# EAGLE board Eddy Backplane (EAGLE 9.5.2)
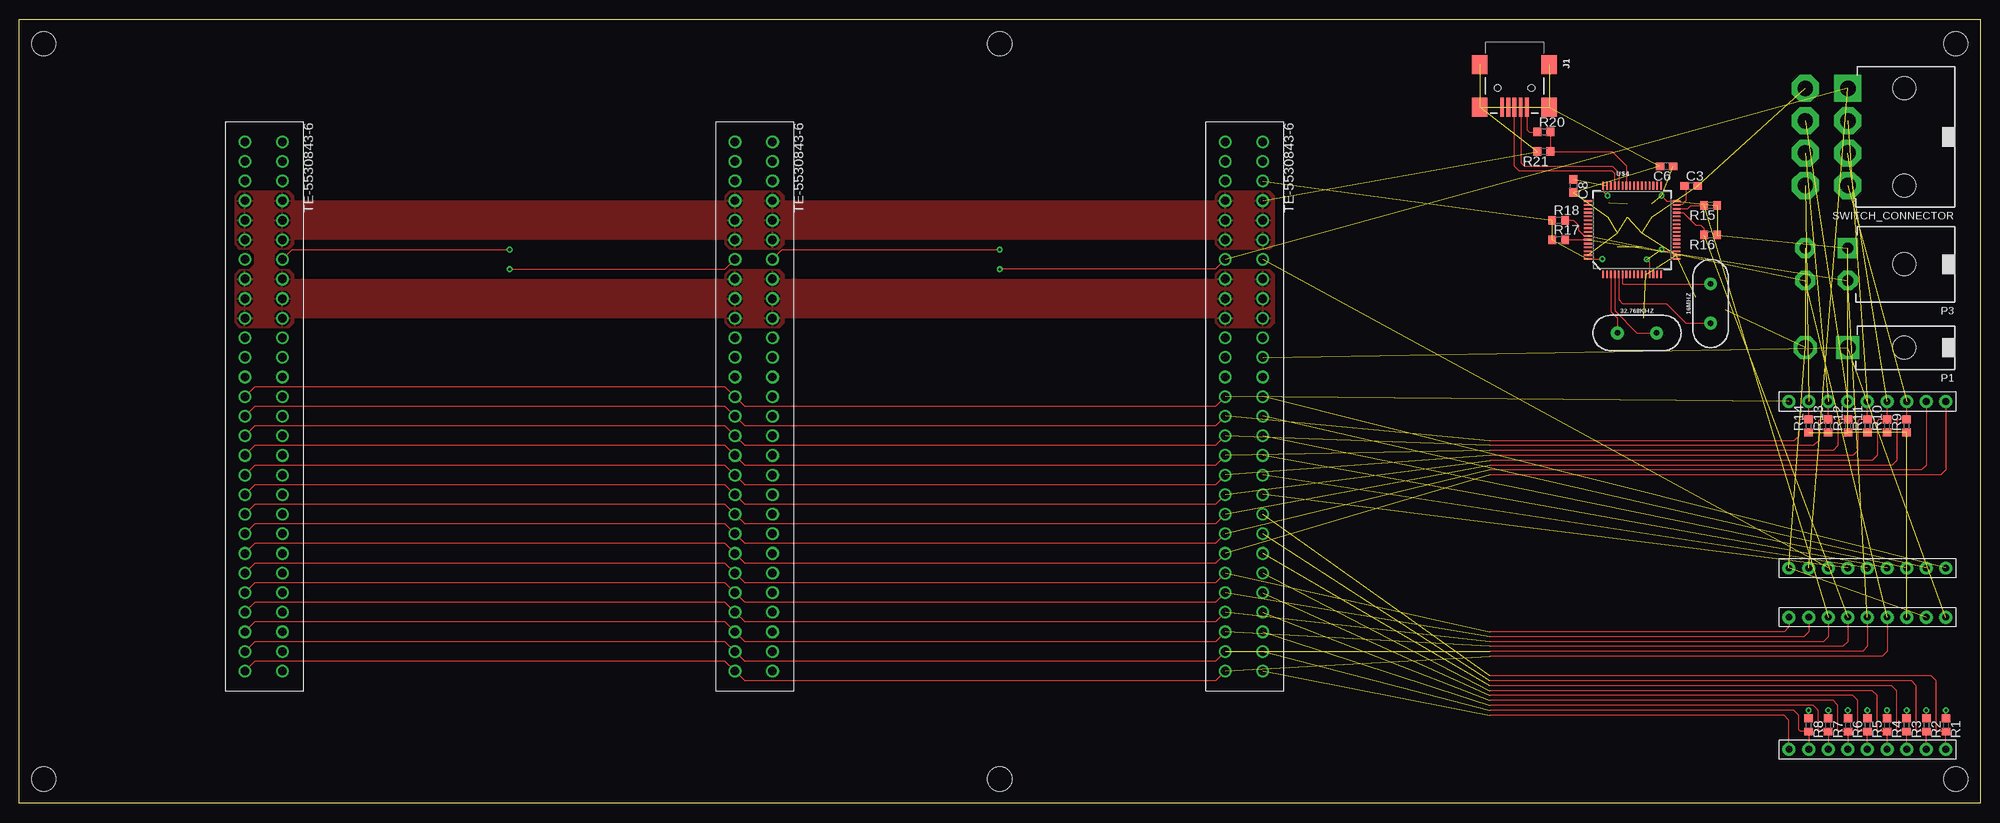
[diagram p0: board, top side]
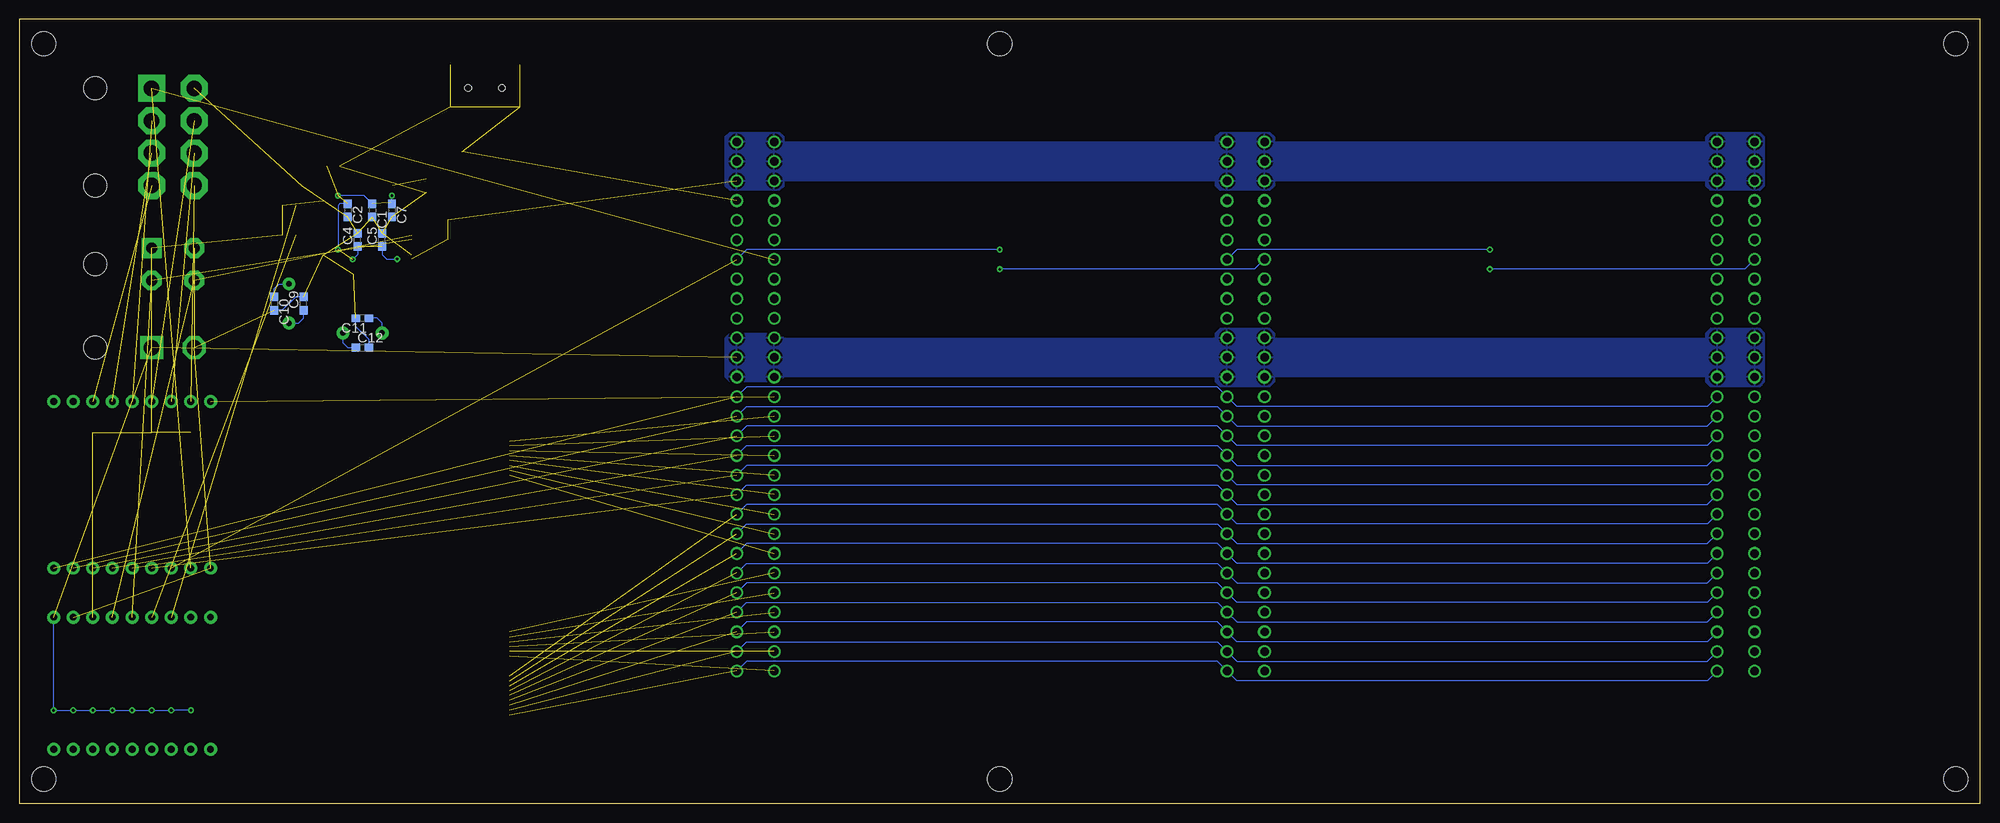
[diagram p1: board, bottom side, seen from below]

Size 254 x 101.6 mm. Coordinates in mm from the lower left corner, seen from the top.
Outline: 0,0 0,101.6 254,101.6 254,0 0,0
Copper layers (1*16): Top 0.035mm / dielectric 1.5mm / Bottom 0.035mm
Design rules "default": minimum track width 6mil, minimum drill 0.35mm, track to track 6mil, track to pad 6mil, pad to pad 6mil, via to via 6mil, smd to smd 6mil, copper to edge 40mil, drill to drill 6mil, minimum pad ring 10mil, minimum via ring 8mil, stop-mask expansion 4mil, vias tented up to drill 0mil, thermal gap 10mil
Holes 3.17 mm at 3.17,98.42 3.17,3.17 250.82,98.42 127,98.42 127,3.17 250.82,3.17

## Footprints (pad centres in the part's own frame; a part is rotated, then mirrored left to right if it is on the bottom)
HC49US = drill 0.7 pad 1.651: 1 -2.54,0; 2 2.54,0
C0603 = smd 1.1 x 1: 1 -0.85,0; 2 0.85,0
USB-MINIB = smd 2.5 x 0.5: D+ 2.5,0; D- 2.5,0.8; GND 2.5,-1.6; ID 2.5,-0.8; VBUS 2.5,1.6 | smd 2.5 x 2: S1 -3,4.5; S2 2.5,4.5; S3 -3,-4.5; S4 2.5,-4.5 | hole 0.9: 0,2.2; 0,-2.2
39-30-?02? = drill 2 pad 3 square: 1 0,0 | drill 2 pad 3 octagon: 2 0,5.512 | hole 3: 0,-7.3
39-30-?04? = drill 1.422 pad 2.54 square: 1 2.095,0 | drill 1.422 pad 2.54 octagon: 2 -2.095,0; 3 2.095,5.512; 4 -2.095,5.512 | hole 3: 0,-7.3
929852-01-09_1ROW = drill 0.889 pad 1.676: P$1 1.27,1.27; P$2 3.81,1.27; P$3 6.35,1.27; P$4 8.89,1.27; P$5 11.43,1.27; P$6 13.97,1.27; P$7 16.51,1.27; P$8 19.05,1.27; P$9 21.59,1.27
R0603 = smd 1 x 1.1: 1 -0.85,0; 2 0.85,0
39-30-?08? = drill 2 pad 3.5 square: 1 6.287,0 | drill 2 pad 3.5 octagon: 2 2.095,0; 3 -2.095,0; 4 -6.287,0; 5 6.287,5.512; 6 2.095,5.512; 7 -2.095,5.512; 8 -6.287,5.512 | hole 3: -6.287,-7.3; 6.287,-7.3
5530843-6-BACKPLANEMATE = drill 1.092: 1 0,4.851; 2 2.54,4.851; 3 5.08,4.851; 4 7.62,4.851; 5 10.16,4.851; 6 12.7,4.851; 7 15.24,4.851; 8 17.78,4.851; 9 20.32,4.851; 10 22.86,4.851; 11 25.4,4.851; 12 27.94,4.851; 13 30.48,4.851; 14 33.02,4.851; 15 35.56,4.851; 16 38.1,4.851; 17 40.64,4.851; 18 43.18,4.851; 19 45.72,4.851; 20 48.26,4.851; 21 50.8,4.851; 22 53.34,4.851; 23 55.88,4.851; 24 58.42,4.851; 25 60.96,4.851; 26 63.5,4.851; 27 66.04,4.851; 28 68.58,4.851; 29 68.58,0; 30 66.04,0; 31 63.5,0; 32 60.96,0; 33 58.42,0; 34 55.88,0; 35 53.34,0; 36 50.8,0; 37 48.26,0; 38 45.72,0; 39 43.18,0; 40 40.64,0; 41 38.1,0; 42 35.56,0; 43 33.02,0; 44 30.48,0; 45 27.94,0; 46 25.4,0; 47 22.86,0; 48 20.32,0; 49 17.78,0; 50 15.24,0; 51 12.7,0; 52 10.16,0; 53 7.62,0; 54 5.08,0; 55 2.54,0; 56 0,0
TQFP64 = smd 0.22 x 1: 1 -3.75,-5.75; 2 -3.25,-5.75; 3 -2.75,-5.75; 4 -2.25,-5.75; 5 -1.75,-5.75; 6 -1.25,-5.75; 7 -0.75,-5.75; 8 -0.25,-5.75; 9 0.25,-5.75; 10 0.75,-5.75; 11 1.25,-5.75; 12 1.75,-5.75; 13 2.25,-5.75; 14 2.75,-5.75; 15 3.25,-5.75; 16 3.75,-5.75; 33 3.75,5.75; 34 3.25,5.75; 35 2.75,5.75; 36 2.25,5.75; 37 1.75,5.75; 38 1.25,5.75; 39 0.75,5.75; 40 0.25,5.75; 41 -0.25,5.75; 42 -0.75,5.75; 43 -1.25,5.75; 44 -1.75,5.75; 45 -2.25,5.75; 46 -2.75,5.75; 47 -3.25,5.75; 48 -3.75,5.75 | smd 1 x 0.22: 17 5.75,-3.75; 18 5.75,-3.25; 19 5.75,-2.75; 20 5.75,-2.25; 21 5.75,-1.75; 22 5.75,-1.25; 23 5.75,-0.75; 24 5.75,-0.25; 25 5.75,0.25; 26 5.75,0.75; 27 5.75,1.25; 28 5.75,1.75; 29 5.75,2.25; 30 5.75,2.75; 31 5.75,3.25; 32 5.75,3.75; 49 -5.75,3.75; 50 -5.75,3.25; 51 -5.75,2.75; 52 -5.75,2.25; 53 -5.75,1.75; 54 -5.75,1.25; 55 -5.75,0.75; 56 -5.75,0.25; 57 -5.75,-0.25; 58 -5.75,-0.75; 59 -5.75,-1.25; 60 -5.75,-1.75; 61 -5.75,-2.25; 62 -5.75,-2.75; 63 -5.75,-3.25; 64 -5.75,-3.75

## Placement (x,y rotation side)
16MHZ  [HC49US]  219.07,64.77 90 top
32.768KHZ  [HC49US]  209.55,60.96 0 top
C1  0.1 uF  [C0603]  208.28,76.83 270 bottom
C2  0.1 uF  [C0603]  211.46,76.83 270 bottom
C3  2.2 uF  [C0603]  216.53,80.01 0 top
C4  0.1 uF  [C0603]  210.19,73.03 90 bottom
C5  0.1 uF  [C0603]  207.01,73.03 90 bottom
C6  0.1 uF  [C0603]  213.36,82.55 180 top
C7  0.1 uF  [C0603]  205.74,76.83 270 bottom
C8  2.2 uF  [C0603]  201.29,80.01 270 top
C9  [C0603]  217.17,64.77 90 bottom
C10  [C0603]  220.98,64.77 270 bottom
C11  [C0603]  209.55,62.87 180 bottom
C12  [C0603]  209.55,59.05 0 bottom
J1  USB_MINI-B_SMT  [USB-MINIB]  193.68,92.71 270 top
P1  39-30-02?_S  [39-30-?02?]  236.85,59.05 90 top
P3  39-30-04?_S  [39-30-?04?]  236.85,69.85 90 top
PWR_ON  929870-01-09_3  [929852-01-09_1ROW]  250.82,31.75 180 top
R1  10k  [R0603]  249.56,10.16 270 top
R2  10k  [R0603]  247.01,10.16 270 top
R3  10k  [R0603]  244.47,10.16 270 top
R4  10k  [R0603]  241.94,10.16 270 top
R5  10k  [R0603]  239.4,10.16 270 top
R6  10k  [R0603]  236.85,10.16 270 top
R7  10k  [R0603]  234.31,10.16 270 top
R8  10k  [R0603]  231.78,10.16 270 top
R9  10k  [R0603]  244.47,48.9 90 top
R10  10k  [R0603]  241.94,48.9 90 top
R11  10k  [R0603]  239.4,48.9 90 top
R12  10k  [R0603]  236.85,48.9 90 top
R13  10k  [R0603]  234.31,48.9 90 top
R14  10k  [R0603]  231.78,48.9 90 top
R15  4.7k  [R0603]  219.07,77.47 180 top
R16  4.7k  [R0603]  219.07,73.66 180 top
R17  4.7k  [R0603]  199.39,73.03 0 top
R18  4.7k  [R0603]  199.39,75.56 0 top
R20  5K  [R0603]  197.49,87 0 top
R21  10K  [R0603]  197.49,84.45 180 top
SWITCH_CONN  929870-01-09_1  [929852-01-09_1ROW]  227.97,50.8 0 top
SWITCH_CONNECTOR  39-30-08?_S  [39-30-?08?]  236.85,86.36 90 top
U$1  5530843-FEMALE  [5530843-6-BACKPLANEMATE]  92.71,85.72 270 top
U$2  5530843-FEMALE  [5530843-6-BACKPLANEMATE]  29.21,85.72 270 top
U$3  5530843-FEMALE  [5530843-6-BACKPLANEMATE]  156.21,85.72 270 top
U$4  STM32F405RGT6  [TQFP64]  208.91,74.3 0 top
U$6  929870-01-09_2  [929852-01-09_1ROW]  227.97,5.71 0 top
U$8  929870-01-09_4  [929852-01-09_1ROW]  227.97,22.86 0 top

## Library data of the parts
16MHZ 32.768KHZ = SparkFun-Clocks
C1-C12 = rcl; SPICEPREFIX: C
J1 = SparkFun-Connectors; PROD_ID: CONN-08193; SF_ID: PRT-00587
P1 P3 SWITCH_CONNECTOR = con-molex-mini-fit
PWR_ON SWITCH_CONN U$6 U$8 = 3M_929852_Connector
R1-R18 R20 R21 = rcl; SPICEPREFIX: R
U$1-U$3 = 5530843-6
U$4 = SparkFun-IC-Microcontroller; PROD_ID: IC-11709

## Nets
3.3V: C1.1 C2.1 C4.1 C5.1 C6.1 C7.1 P3.1 R9.1 R10.1 R11.1 R12.1 R13.1 R14.1 R15.1 R16.1 R17.1 R18.1 U$1.1 U$1.2 U$1.3 U$1.54 U$1.55 U$1.56 U$2.1 U$2.2 U$2.3 U$2.54 U$2.55 U$2.56 U$3.1 U$3.2 U$3.3 U$3.54 U$3.55 U$3.56 U$4.13 U$4.19 U$4.32 U$4.48 U$4.64 U$8.P$7
3.3V_ON/OFF: PWR_ON.P$1 U$1.14 U$2.14 U$3.14
5V: P1.1 R1.1 R2.1 R3.1 R4.1 R5.1 R6.1 R7.1 R8.1 U$1.11 U$1.12 U$1.13 U$1.44 U$1.45 U$1.46 U$2.11 U$2.12 U$2.13 U$2.44 U$2.45 U$2.46 U$3.11 U$3.12 U$3.13 U$3.44 U$3.45 U$3.46 U$8.P$9
5V_ON/OFF: PWR_ON.P$2 U$1.15 U$2.15 U$3.15
12V_ON/OFF: PWR_ON.P$3 U$1.16 U$2.16 U$3.16
ACOUSTIC_ON/OFF: PWR_ON.P$4 U$1.17 U$2.17 U$3.17
BACKPLANE_SCL: R16.2 U$1.31 U$2.31 U$3.31 U$4.29 U$8.P$4
BACKPLANE_SDA: R15.2 U$1.32 U$2.32 U$3.32 U$4.30 U$8.P$3
CONTROL_SIGNAL: PWR_ON.P$7 U$1.7 U$2.7 U$3.7
D+: J1.D+ U$4.45
D-: J1.D- U$4.44
GND: C1.2 C2.2 C3.2 C4.2 C5.2 C6.2 C7.2 C8.2 C9.2 C10.2 C11.2 C12.2 J1.GND J1.S1 J1.S2 J1.S3 J1.S4 P1.2 P3.3 PWR_ON.P$9 R21.2 SWITCH_CONNECTOR.5 U$1.4 U$1.5 U$1.6 U$1.8 U$1.9 U$1.10 U$1.47 U$1.48 U$1.49 U$1.51 U$1.52 U$1.53 U$2.4 U$2.5 U$2.6 U$2.8 U$2.9 U$2.10 U$2.47 U$2.48 U$2.49 U$2.51 U$2.52 U$2.53 U$3.4 U$3.5 U$3.6 U$3.8 U$3.9 U$3.10 U$3.47 U$3.48 U$3.49 U$3.51 U$3.52 U$3.53 U$4.12 U$4.18 U$4.63 U$8.P$8
JETSON_ON/OFF: PWR_ON.P$5 U$1.18 U$2.18 U$3.18
KILL_SWITCH: R9.2 SWITCH_CONN.P$7 SWITCH_CONNECTOR.4 U$1.37 U$2.37 U$3.37
MOBO_ON/OFF: PWR_ON.P$6 U$1.19 U$2.19 U$3.19
N$1: C3.1 U$4.31
N$2: C8.1 U$4.47
N$3: 16MHZ.1 C9.1 U$4.5
N$4: 16MHZ.2 C10.1 U$4.6
N$5: 32.768KHZ.1 C11.1 U$4.3
N$6: 32.768KHZ.2 C12.1 U$4.4
PLTA_ON/OFF: PWR_ON.P$8 SWITCH_CONNECTOR.1 U$1.50 U$2.50 U$3.50
PWM_1: R1.2 U$1.20 U$2.20 U$3.20 U$6.P$9
PWM_2: R2.2 U$1.21 U$2.21 U$3.21 U$6.P$8
PWM_3: R3.2 U$1.22 U$2.22 U$3.22 U$6.P$7
PWM_4: R4.2 U$1.23 U$2.23 U$3.23 U$6.P$6
PWM_5: R5.2 U$1.24 U$2.24 U$3.24 U$6.P$5
PWM_6: R6.2 U$1.25 U$2.25 U$3.25 U$6.P$4
PWM_7: R7.2 U$1.26 U$2.26 U$3.26 U$6.P$3
PWM_8: R8.2 U$1.27 U$2.27 U$3.27 U$6.P$2
ROBOT_SCL: P3.4 R18.2 U$1.29 U$2.29 U$3.29 U$4.58 U$8.P$6
ROBOT_SDA: P3.2 R17.2 U$1.30 U$2.30 U$3.30 U$4.59 U$8.P$5
SPARE2: U$1.28 U$2.28 U$3.28 U$6.P$1
SPARE3: U$1.33 U$2.33 U$3.33 U$8.P$2
SPARE4: U$1.34 U$2.34 U$3.34 U$8.P$1
SPARE5: SWITCH_CONN.P$9 U$1.35 U$2.35 U$3.35
SPARE6: SWITCH_CONN.P$8 U$1.36 U$2.36 U$3.36
SPARE7: SWITCH_CONN.P$1 U$1.43 U$2.43 U$3.43
SWITCH_1: R10.2 SWITCH_CONN.P$6 SWITCH_CONNECTOR.3 U$1.38 U$2.38 U$3.38
SWITCH_2: R11.2 SWITCH_CONN.P$5 SWITCH_CONNECTOR.2 U$1.39 U$2.39 U$3.39
SWITCH_3: R12.2 SWITCH_CONN.P$4 SWITCH_CONNECTOR.6 U$1.40 U$2.40 U$3.40
SWITCH_4: R13.2 SWITCH_CONN.P$3 SWITCH_CONNECTOR.7 U$1.41 U$2.41 U$3.41
SWITCH_5: R14.2 SWITCH_CONN.P$2 SWITCH_CONNECTOR.8 U$1.42 U$2.42 U$3.42
VBUS: J1.VBUS R20.1
VBUS_3.3: R20.2 R21.1 U$4.42

## Tracks (layer width: path | path; a pad name or v marks a point on that pad's centre or on a via)
3.3V  (via drill 0.35)  (18 unrouted)
  Top 0.152: v212.72,71.75 212.94,71.55 U$4.19 | v210.82,70.48 211.16,70.14 U$4.13 | U$4.64 v205.04,70.55 | v205.74,78.74 205.74,78.72 205.16,79.29 U$4.48 | U$4.32 213.42,78.05 v212.72,78.74
  Bottom 0.152: 205.87,77.81 C7.1 v205.74,78.74 | C2.1 212.51,77.69 212.72,77.47 v212.72,71.75 | C4.1 210.19,71.12 v210.82,70.48 | 206.79,72.17 C5.1 207.01,71.12 206.44,70.55 v205.04,70.55 | C1.1 209.34,78.74 v212.72,78.74
  pour Bottom: 154.94,80.64 154.94,80.01 155.57,79.38 161.93,79.38 162.56,80.01 162.56,86.36 161.93,87 155.57,87 154.94,86.36 154.94,85.72 99.06,85.72 99.06,86.36 98.42,87 92.08,87 91.44,86.36 91.44,85.72 35.56,85.72 35.56,86.36 34.92,87 28.57,87 27.94,86.36 27.94,80.01 28.57,79.38 34.92,79.38 35.56,80.01 35.56,80.64 91.44,80.64 91.44,80.01 92.08,79.38 98.42,79.38 99.06,80.01 99.06,80.64
3.3V_ON/OFF  (1 unrouted)
  Bottom 0.152: U$2.14 35.33,51.44 96.29,51.44 U$1.14 98.83,53.98 159.79,53.98 U$3.14
5V  (via drill 0.35)  (2 unrouted)
  Top 0.152: R8.1 v231.78,12.06 | v234.31,12.06 R7.1 | R6.1 v236.85,12.06 | R5.1 v239.4,12.06 | R4.1 v241.94,12.06 | R3.1 v244.47,12.06 | R2.1 v247.01,12.06 | R1.1 v249.56,12.06
  Bottom 0.152: v231.78,12.06 v234.31,12.06 v236.85,12.06 v239.4,12.06 v241.94,12.06 v244.47,12.06 v247.01,12.06 v249.56,12.06 U$8.P$9
  pour Bottom: 27.94,55.24 27.94,54.61 28.57,53.98 34.92,53.98 35.56,54.61 35.56,55.24 91.44,55.24 91.44,54.61 92.08,53.98 98.42,53.98 99.06,54.61 99.06,55.24 154.94,55.24 155.57,54.61 161.93,54.61 162.56,55.24 162.56,60.33 161.93,60.96 155.57,60.96 154.94,60.33 99.06,60.33 99.06,60.96 98.42,61.59 92.08,61.59 91.44,60.96 91.44,60.33 35.56,60.33 35.56,60.96 34.92,61.59 28.57,61.59 27.94,60.96
5V_ON/OFF  (1 unrouted)
  Bottom 0.152: U$2.15 35.33,48.9 96.29,48.9 U$1.15 98.83,51.44 159.79,51.44 U$3.15
12V_ON/OFF  (1 unrouted)
  Bottom 0.152: U$2.16 35.33,46.35 96.29,46.35 U$1.16 98.83,48.9 159.79,48.9 U$3.16
ACOUSTIC_ON/OFF  (1 unrouted)
  Bottom 0.152: U$2.17 35.33,43.81 96.29,43.81 U$1.17 98.83,46.35 159.79,46.35 U$3.17
BACKPLANE_SCL  (2 unrouted)
  Top 0.152: U$2.31 30.48,23.5 91.44,23.5 U$1.31 93.98,20.95 154.94,20.95 U$3.31 | U$4.29 215.56,76.55 217.17,74.93 217.81,74.93 218.22,74.51 R16.2 | U$8.P$4 236.85,20.95 236.22,20.32 190.5,20.32
BACKPLANE_SDA  (2 unrouted)
  Top 0.152: U$2.32 30.48,26.04 91.44,26.04 U$1.32 93.98,23.5 154.94,23.5 U$3.32 | U$4.30 216.11,77.05 216.53,77.47 R15.2 | U$8.P$3 234.31,21.59 233.68,20.95 190.5,20.95
CONTROL_SIGNAL  (via drill 0.35)  (1 unrouted)
  Top 0.152: U$2.7 35.33,71.75 v63.5,71.75 | U$1.7 98.83,71.75 v127,71.75
  Bottom 0.152: U$1.7 96.29,71.75 v63.5,71.75 | v127,71.75 159.79,71.75 U$3.7
D+
  Top 0.152: U$4.45 206.66,81.62 206.38,81.92 194.31,81.92 193.68,82.55 J1.D+
D-
  Top 0.152: J1.D- 194.47,83.02 194.94,82.55 206.38,82.55 207.16,81.76 U$4.44
GND  (24 unrouted)
  Bottom 0.152: C12.2 208.7,60.11 210.4,61.81 C11.2 | C10.2 219.93,63.92 218.22,65.62 C9.2
  pour Top: 28.57,61.59 27.94,62.23 27.94,68.58 28.57,69.22 29.84,69.22 30.48,69.85 30.48,71.12 29.84,71.75 28.57,71.75 27.94,72.39 27.94,78.74 28.57,79.38 34.92,79.38 35.56,78.74 35.56,78.11 91.44,78.11 91.44,78.74 92.08,79.38 98.42,79.38 99.06,78.74 99.06,78.11 154.94,78.11 154.94,78.74 155.57,79.38 161.93,79.38 162.56,78.74 162.56,78.11 162.56,72.39 161.93,71.75 155.57,71.75 154.94,72.39 154.94,73.03 99.06,73.03 99.06,72.39 98.42,71.75 92.08,71.75 91.44,72.39 91.44,73.03 35.56,73.03 35.56,72.39 34.92,71.75 33.66,71.75 33.02,71.12 33.02,69.85 33.66,69.22 34.92,69.22 35.56,68.58 35.56,67.94 91.44,67.94 91.44,68.58 92.08,69.22 98.42,69.22 99.06,68.58 99.06,67.94 154.94,67.94 154.94,68.58 155.57,69.22 161.29,69.22 161.93,69.22 162.56,68.58 162.56,62.23 161.93,61.59 155.57,61.59 154.94,62.23 154.94,62.87 99.06,62.87 99.06,62.23 98.42,61.59 92.08,61.59 91.44,62.23 91.44,62.87 35.56,62.87 35.56,62.23 34.92,61.59
JETSON_ON/OFF  (1 unrouted)
  Bottom 0.152: U$2.18 35.33,41.27 96.29,41.27 U$1.18 98.83,43.81 159.79,43.81 U$3.18
KILL_SWITCH  (2 unrouted)
  Top 0.152: U$2.37 30.48,38.73 91.44,38.73 U$1.37 93.98,36.2 154.94,36.2 U$3.37 | SWITCH_CONN.P$7 R9.2 243.42,49.74 243.21,49.53 243.21,44.45 242.57,43.81 190.5,43.81
MOBO_ON/OFF  (1 unrouted)
  Bottom 0.152: U$2.19 35.33,38.73 96.29,38.73 U$1.19 98.83,41.27 159.79,41.27 U$3.19
N$1
  Top 0.152: C3.1 215.9,79.8 215.9,78.11 215.39,77.6 214.72,77.6 U$4.31
N$2  (1 unrouted)
N$3
  Top 0.152: U$4.5 207.16,65.25 207.65,64.77 213.36,64.77 215.9,62.23 16MHZ.1
  Bottom 0.152: 16MHZ.1 217.81,62.23 217.17,62.87 C9.1
N$4
  Top 0.152: U$4.6 207.66,67.33 207.69,67.31 16MHZ.2
  Bottom 0.152: C10.1 220.98,66.67 220.34,67.31 16MHZ.2
N$5
  Top 0.152: U$4.3 206.16,63.71 207.01,62.87 32.768KHZ.1
  Bottom 0.152: 32.768KHZ.1 207.01,62.23 207.65,62.87 C11.1
N$6
  Top 0.152: U$4.4 206.66,63.84 209.55,60.96 32.768KHZ.2
  Bottom 0.152: 32.768KHZ.2 212.09,59.69 211.46,59.05 C12.1
PLTA_ON/OFF  (via drill 0.35)  (2 unrouted)
  Top 0.152: U$1.50 91.44,69.22 v63.5,69.22 | U$3.50 154.94,69.22 v127,69.22
  Bottom 0.152: U$2.50 30.48,69.22 v63.5,69.22 | U$1.50 93.98,69.22 v127,69.22
PWM_1  (1 unrouted)
  Top 0.152: U$6.P$9 R1.2 248.5,9.31 248.28,9.53 248.28,15.88 247.65,16.51 190.5,16.51
  Bottom 0.152: U$2.20 35.33,36.2 96.29,36.2 U$1.20 98.83,38.73 159.79,38.73 U$3.20
PWM_2  (1 unrouted)
  Top 0.152: U$6.P$8 R2.2 245.96,9.31 245.75,9.53 245.75,15.24 245.11,15.88 190.5,15.88
  Bottom 0.152: U$2.21 35.33,33.66 96.29,33.66 U$1.21 98.83,36.2 159.79,36.2 U$3.21
PWM_3  (1 unrouted)
  Top 0.152: U$6.P$7 R3.2 243.42,9.31 243.21,9.53 243.21,14.61 242.57,15.24 190.5,15.24
  Bottom 0.152: U$2.22 35.33,31.11 96.29,31.11 U$1.22 98.83,33.66 159.79,33.66 U$3.22
PWM_4  (1 unrouted)
  Top 0.152: U$6.P$6 R4.2 240.88,9.31 240.66,9.53 240.66,13.97 240.03,14.61 190.5,14.61
  Bottom 0.152: U$2.23 35.33,28.57 96.29,28.57 U$1.23 98.83,31.11 159.79,31.11 U$3.23
PWM_5  (1 unrouted)
  Top 0.152: U$6.P$5 R5.2 238.34,9.31 238.12,9.53 238.12,13.34 237.49,13.97 190.5,13.97
  Bottom 0.152: U$2.24 35.33,26.04 96.29,26.04 U$1.24 98.83,28.57 159.79,28.57 U$3.24
PWM_6  (1 unrouted)
  Top 0.152: U$6.P$4 R6.2 235.8,9.31 235.59,9.53 235.59,12.7 234.95,13.34 190.5,13.34
  Bottom 0.152: U$2.25 35.33,23.5 96.29,23.5 U$1.25 98.83,26.04 159.79,26.04 U$3.25
PWM_7  (1 unrouted)
  Top 0.152: U$6.P$3 R7.2 233.26,9.31 233.04,9.53 233.04,12.06 232.41,12.7 190.5,12.7
  Bottom 0.152: U$2.26 35.33,20.95 96.29,20.95 U$1.26 98.83,23.5 159.79,23.5 U$3.26
PWM_8  (1 unrouted)
  Top 0.152: U$6.P$2 R8.2 230.72,9.31 230.5,9.53 230.5,11.43 229.87,12.06 190.5,12.06
  Bottom 0.152: U$2.27 35.33,18.41 96.29,18.41 U$1.27 98.83,20.95 159.79,20.95 U$3.27
ROBOT_SCL  (3 unrouted)
  Top 0.152: U$2.29 30.48,18.41 91.44,18.41 U$1.29 93.98,15.88 154.94,15.88 U$3.29 | R18.2 201.29,75.56 201.93,74.93 201.93,74.3 202.68,73.55 U$4.58 | U$8.P$6 241.94,19.68 241.3,19.05 190.5,19.05
ROBOT_SDA  (3 unrouted)
  Top 0.152: U$2.30 30.48,20.95 91.44,20.95 U$1.30 93.98,18.41 154.94,18.41 U$3.30 | R17.2 200.26,73.05 U$4.59 | U$8.P$5 239.4,20.32 238.76,19.68 190.5,19.68
SPARE2  (1 unrouted)
  Top 0.152: U$6.P$1 229.24,10.79 228.6,11.43 190.5,11.43
  Bottom 0.152: U$2.28 35.33,15.88 96.29,15.88 U$1.28 98.83,18.41 159.79,18.41 U$3.28
SPARE3  (1 unrouted)
  Top 0.152: U$2.33 30.48,28.57 91.44,28.57 U$1.33 93.98,26.04 154.94,26.04 U$3.33 | U$8.P$2 231.78,22.23 231.14,21.59 190.5,21.59
SPARE4  (1 unrouted)
  Top 0.152: U$2.34 30.48,31.11 91.44,31.11 U$1.34 93.98,28.57 154.94,28.57 U$3.34 | U$8.P$1 229.24,22.86 228.6,22.23 190.5,22.23
SPARE5  (1 unrouted)
  Top 0.152: U$2.35 30.48,33.66 91.44,33.66 U$1.35 93.98,31.11 154.94,31.11 U$3.35 | SWITCH_CONN.P$9 249.56,43.18 248.92,42.55 190.5,42.55
SPARE6  (1 unrouted)
  Top 0.152: U$2.36 30.48,36.2 91.44,36.2 U$1.36 93.98,33.66 154.94,33.66 U$3.36 | SWITCH_CONN.P$8 247.01,43.81 246.38,43.18 190.5,43.18
SPARE7  (1 unrouted)
  Top 0.152: U$2.43 30.48,53.98 91.44,53.98 U$1.43 93.98,51.44 154.94,51.44 U$3.43
SWITCH_1  (2 unrouted)
  Top 0.152: U$2.38 30.48,41.27 91.44,41.27 U$1.38 93.98,38.73 154.94,38.73 U$3.38 | SWITCH_CONN.P$6 R10.2 240.88,49.74 240.66,49.53 240.66,45.09 240.03,44.45 190.5,44.45
SWITCH_2  (2 unrouted)
  Top 0.152: U$2.39 30.48,43.81 91.44,43.81 U$1.39 93.98,41.27 154.94,41.27 U$3.39 | SWITCH_CONN.P$5 R11.2 238.34,49.74 238.12,49.53 238.12,45.72 237.49,45.09 190.5,45.09
SWITCH_3  (2 unrouted)
  Top 0.152: U$2.40 30.48,46.35 91.44,46.35 U$1.40 93.98,43.81 154.94,43.81 U$3.40 | SWITCH_CONN.P$4 R12.2 235.8,49.74 235.59,49.53 235.59,46.35 234.95,45.72 190.5,45.72
SWITCH_4  (2 unrouted)
  Top 0.152: U$2.41 30.48,48.9 91.44,48.9 U$1.41 93.98,46.35 154.94,46.35 U$3.41 | SWITCH_CONN.P$3 R13.2 233.26,49.74 233.04,49.53 233.04,46.99 232.41,46.35 190.5,46.35
SWITCH_5  (2 unrouted)
  Top 0.152: U$2.42 30.48,51.44 91.44,51.44 U$1.42 93.98,48.9 154.94,48.9 U$3.42 | SWITCH_CONN.P$2 R14.2 230.72,49.74 230.5,49.53 230.5,47.62 229.87,46.99 190.5,46.99
VBUS
  Top 0.152: J1.VBUS 195.28,87.3 195.58,87 R20.1
VBUS_3.3
  Top 0.152: R20.2 R21.1 206.38,84.45 208.16,82.67 U$4.42